# Altium PCB Trottinette_Connexion_2L.PcbDoc
Units mil, origin at the board's own origin, x right, y up, seen from the top; angles counter-clockwise.
Board outline 2559.06 x 4133.86 mil, 2 copper layers (Top, Bottom), stack 60.63 mil thick; 20 components, 19 nets, 72 pads, 12 vias.
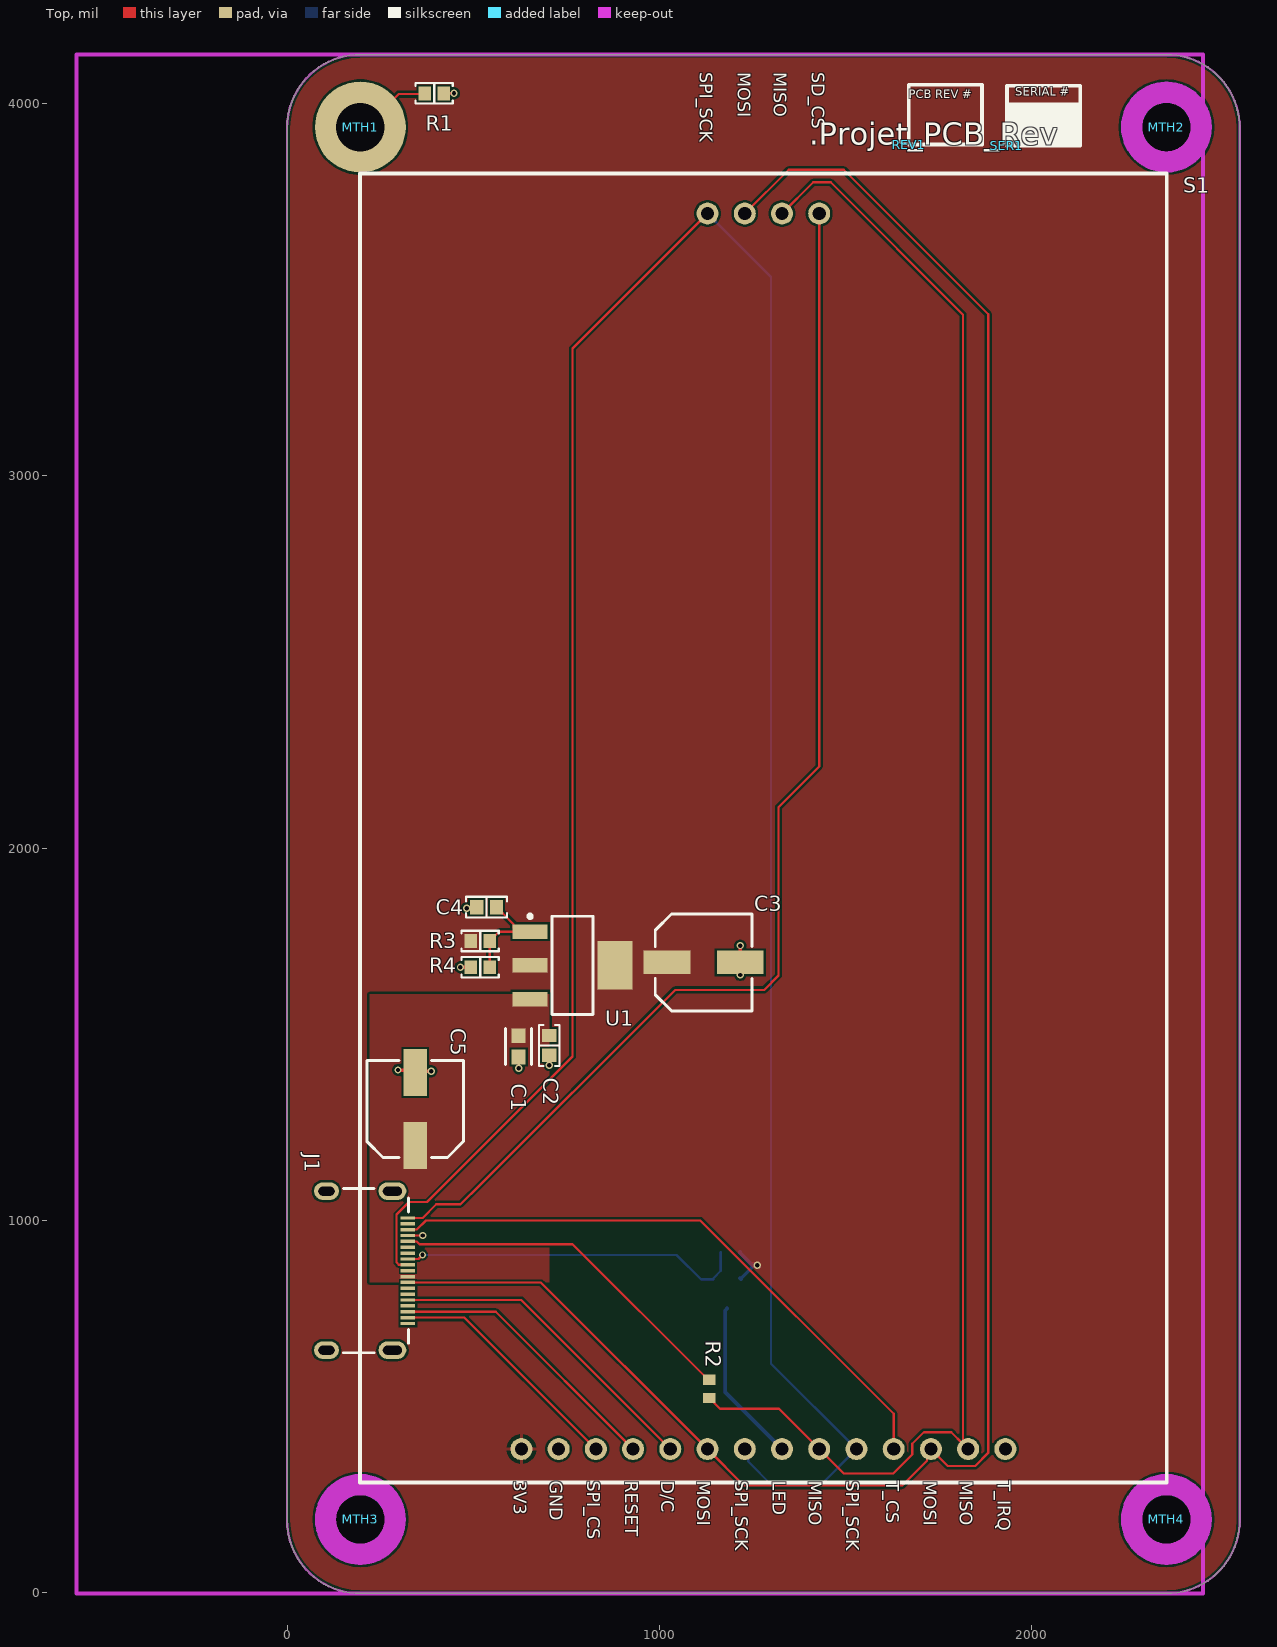
[diagram p0: Top view]
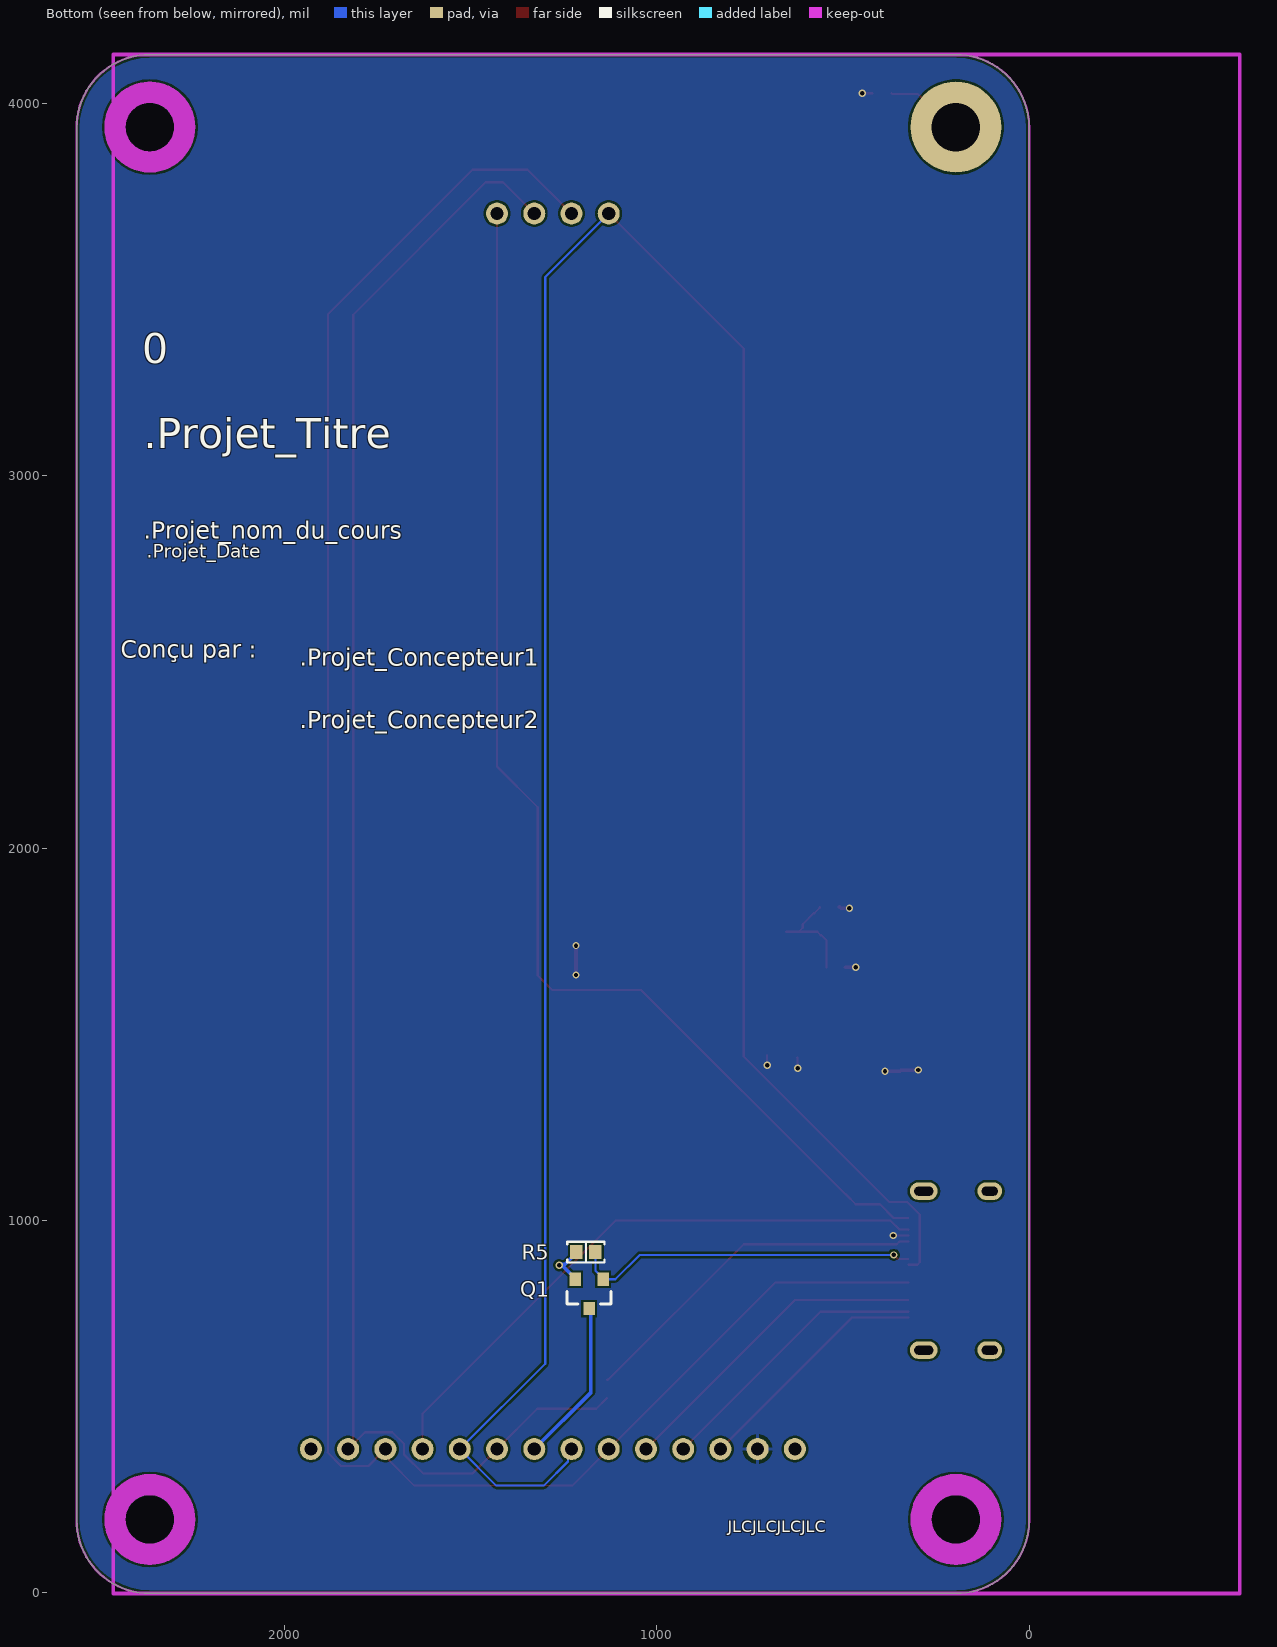
[diagram p1: Bottom view, seen from below]
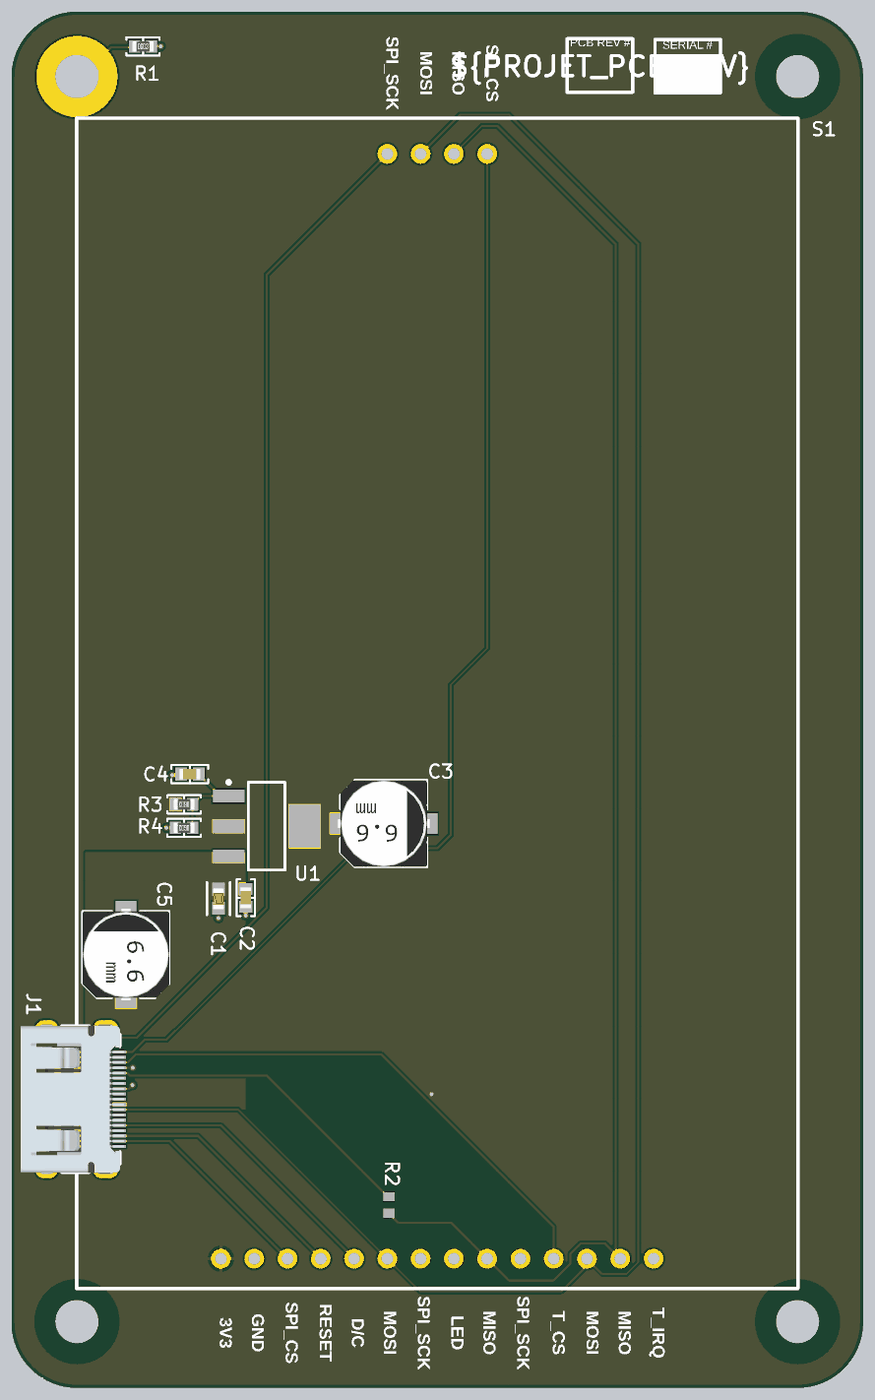
[diagram p2: 3D render of the assembled board from above, using the file's embedded part models]

## Layer stack, top to bottom
Top Solder: solder mask 0.4, Solder Resist, Dk 3.5
Top: signal copper 1.378
Dielectric 1: core 57.874, FR-4, Dk 4.6
Bottom: signal copper 1.378
Bottom Solder: solder mask 0.4, Solder Resist, Dk 3.5

## Board outline
0,194.84 0,3935 cw(c196.85,3935) 196.85,4131.85 2362.2,4131.85 cw(c2362.2,3935) 2559.06,3935 2559.06,194.84 cw(c2362.2,194.84) 2362.2,-2.01 196.85,-2.01 cw(c196.85,194.84)

## Design rules (kind name [scope] priority, off if disabled: settings)
BoardOutlineClearance [All] p1: gap=7.87 ignorepadtopadclearanceinfootprint=FALSE except(0: Arc-SplitContinuation Track-SplitContinuation SMDPad-SplitContinuation THPad-SplitContinuation Via-SplitContinuation Fill-SplitContinuation Poly-SplitContinuation Region-SplitContinuation Text-SplitContinuation)
Clearance [All] p1: gap=6 ignorepadtopadclearanceinfootprint=FALSE except(0: Arc-Hole Track-Hole SMDPad-Hole THPad-Hole Via-Hole Fill-Hole Poly-Hole Region-Hole Text-Hole; 5: Arc-Arc Arc-Track Track-Track SMDPad-Fill SMDPad-Poly SMDPad-Region; 5.98: Via-Fill Via-Poly Via-Region; 7.87: Arc-SMDPad Track-SMDPad; 10: Arc-Via Track-Via Via-Via; 12.99: Arc-THPad Track-THPad; 19.68: THPad-THPad)
ComponentClearance "Schematic Component Clearance Constraint_1" [InComponent('SER1')] p1: gap=0 collisioncheckmode=3 verticalgap=0 showdistances=FALSE
ComponentClearance "Schematic Component Clearance Constraint" [InComponent('REV1')] p2: gap=0 collisioncheckmode=3 verticalgap=0 showdistances=FALSE
ComponentClearance [All] p3: gap=4 collisioncheckmode=3 verticalgap=4 showdistances=FALSE
HoleSize [All] p1: absolutevalues=TRUE maxlimit=248.03 minlimit=11.81 maxpercent=80.000 minpercent=20.000
HoleToHoleClearance [All] p1: gap=19.68 allowstackedmicrovias=FALSE
MinimumAnnularRing [All] p1: minimumring=5.12
MinimumSolderMaskSliver [All] p1: minsoldermaskwidth=3.94
PlaneClearance [All] p1: clearance=6
PlaneConnect [All] p1: pad.planeconnectstyle=Relief pad.reliefexpansion=20 pad.reliefentries=4 pad.reliefconductorwidth=10 pad.reliefairgap=10 via.planeconnectstyle=Direct via.reliefexpansion=20 via.reliefentries=4 via.reliefconductorwidth=10 via.reliefairgap=10
PolygonConnect [All] p1: thpad.connectstyle=Relief thpad.reliefconductorwidth=10 thpad.reliefentries=4 thpad.polygonreliefangle="90 Angle" thpad.airgapwidth=10 smdpad.connectstyle=Direct smdpad.reliefconductorwidth=10 smdpad.reliefentries=4 smdpad.polygonreliefangle="90 Angle" smdpad.airgapwidth=10 via.connectstyle=Direct via.reliefconductorwidth=10 via.reliefentries=4 via.polygonreliefangle="90 Angle" via.airgapwidth=10
RoutingVias [All] p1: holewidth=11.81 width=19.68 viastyle="Through Hole" minholewidth=11.81 minwidth=19.68 maxholewidth=248.03 maxwidth=255.91
SilkToSilkClearance [All] p1: silktosilkclearance=4
SilkToSolderMaskClearance [IsPad] p1: minsilkscreentomaskgap=0.94 clearancetoexposedcopper=FALSE
SolderMaskExpansion SolderMaskExpansion_Via [isVia] p1: expansion=4 istentingtop=TRUE
SolderMaskExpansion [All] p2: expansion=2 istentingtop=FALSE
Width [All] p1: maxlimit=1000 minlimit=5 preferedwidth=6 minimp=50.000000 maximp=50.000000 favimp=50.000000
22 further rules are at their usual default settings.

## Classes and differential pairs
component class Trottinette_Connexion_PCB: " " C2 C3 C4 C5 J1 MTH1 MTH2 MTH3 MTH4 Q1 R1 R2 R3 R4 R5 S1 U1
component class Trottinette_Connexion_Title: REV1 SER1

## Components (designator, comment, footprint, x,y, rotation, side; value= is the part's Value field where it differs from the comment)
C1 "0603ZC104MAT2A" FP-0603-L_1_6_0_15-W_0_81-IPC_B 622.1,1467.33 r270 top
C2 "10 µF" "CAP 0603_1608" 704.09,1470.09 r90 top
C3 "100 µF" "CAP ALSMD 6.6MM H6.1MM" 1118.97,1693.09 r0 top
C4 "10 µF" "CAP 0603_1608" 536.08,1841.7 r0 top
C5 "100 µF" "CAP ALSMD 6.6MM H6.1MM" 344.17,1299.25 r90 top
J1 "685119136923" 685119136923 176.85,865 r270 top
MTH1 "MTH_M3" MTH_M3 157.48,3925 r0 top
MTH2 "MTH_M3_NON_PLATED" MTH_M3_NON_PLATED 2362.2,3937.01 r0 top
MTH3 "MTH_M3_NON_PLATED" MTH_M3_NON_PLATED 196.85,196.85 r0 top
MTH4 "MTH_M3_NON_PLATED" MTH_M3_NON_PLATED 2362.2,196.85 r0 top
Q1 "DMP6350S-7" FP-SOT23-MFG 1181.96,802.61 r270 bottom
R1 "0 Ohms" "RES 0603_1608" 395.36,4027.57 r0 top
R2 "ERJ3EKF30R0V" RESC1608X55X30LL15T15 1134.19,547.36 r270 top value=30ohm
R3 "180 Ohms" "RES 0603_1608" 518.86,1750.68 r180 top
R4 "300 Ohms" "RES 0603_1608" 518.86,1680.22 r180 top
R5 "10 kOhms" "RES 0603_1608" 1190.83,915 r0 bottom
REV1 "Revision Cartridge Mini" REV_REVISION_CARTRIDGE_MINI 1670,3890 r0 top
S1 "ILI9341" PCBComponent_1 1279.51,2064.93 r90 top
SER1 "Serial Cartridge MICRO" SER_SERIAL_CARTRIDGE_MICRO 1933.78,3887.48 r0 top
U1 "LM1117MPX-ADJ" MP04A_N 766.97,1685.17 r0 top

## Footprints (in the part's own frame and the unit in brackets; to place one, negate y for a bottom-side part, rotate by r counter-clockwise, add the part's x,y. Pads: shape width x height; smd on the part's side, far side on the other; paste and mask are expansions set on the pad)
685119136923 [mm] "Mini HDMI SMT Horizontal"
  rect 0.23x1 smd: 1(3.6,3.75) 2(3.2,3.75) 3(2.8,3.75) 4(2.4,3.75) 5(2,3.75) 6(1.6,3.75) 7(1.2,3.75) 8(0.8,3.75) 9(0.4,3.75) 10(0,3.75) 11(-0.4,3.75) 12(-0.8,3.75) 13(-1.2,3.75) 14(-1.6,3.75) 15(-2,3.75) 16(-2.4,3.75) 17(-2.8,3.75) 18(-3.2,3.75) 19(-3.6,3.75)
  oval 1.2x1.9 hole 0.6 slot 1.3 at 90 deg: Shell(-5.425,2.7) Shell(5.425,2.7)
  oval 1.2x1.7 hole 0.6 slot 1.1 at 90 deg: Shell(-5.425,-1.8) Shell(5.425,-1.8)
  silkscreen extent -5.6,-0.65 5.6,3.8, body extent -5.62,-3.8 5.63,4.1, height 3.3
"CAP 0603_1608" [mm] "Chip Capacitor, 2-Leads, Body 1.60x0.80mm, IPC Medium Density"
  rect 0.9x1 smd: 1(-0.675,0) 2(0.675,0)
  silkscreen extent -1.4,-0.7 1.4,0.7, body extent -0.8,-0.41 0.8,0.41, height 0.82
"CAP ALSMD 6.6MM H6.1MM" [mm] "Aluminum Electrolytic Capacitor, Body 6.60x6.60x6.10mm, IPC Low Density"
  rect 3.2x1.6 smd: 1(-2.5,0) 2(2.5,0)
  silkscreen extent -3.3,-3.3 3.3,3.3, body extent -3.5,-3.3 3.5,3.3, height 6.1
FP-0603-L_1_6_0_15-W_0_81-IPC_B [mil]
  rect 39.63x38.12 smd paste+0 mask+0: 1(-28.58,0) 2(28.58,0)
  silkscreen extent -48,-35 48,35, body extent -58,-29 58,29, height 10
FP-SOT23-MFG [mm]
  rect 0.9x0.8 smd paste+0 mask+0: 1(-1,0.95) 2(-1,-0.95) 3(1,0)
  silkscreen extent -0.18,-1.5 0.7,1.5, body extent -1.2,-1.45 1.2,1.45, height 1.1
MP04A_N [mm] "SOT223, 4-Leads, Body 6.5x3.5mm, Pitch 2.3mm, Lead Span 7mm, IPC Medium Density"
  rect 2.4x1 smd: 1(-2.9,2.3) 2(-2.9,0) 3(-2.9,-2.3)
  rect 2.4x3.3 smd: 4(2.9,0)
  silkscreen extent -3.02,-3.35 1.4,3.47, body extent -1.86,-3.35 1.86,3.35, height 1.8
MTH_M3 [mm] "Mounting Hole Metric M3"
  round 6.2 hole 3.3 paste-7.62 mask+0.07: 1(1,0.305)
MTH_M3_NON_PLATED [mm] "Mounting Hole Metric M3 NON_PLATED"
  round 0 hole 3.3 unplated paste-7.62 mask+0.07: 1(0,0)
  Top keep-out circle w1.45: c0,0 r2.375
  Bottom keep-out circle w1.45: c0,0 r2.375
PCBComponent_1 [mm]
  round 1.5 hole 0.9: 1(-42.65,16.51) 2(-42.65,13.97) 3(-42.65,11.43) 4(-42.65,8.89) 5(-42.65,6.35) 6(-42.65,3.81) 7(-42.65,1.27) 8(-42.65,-1.27) 9(-42.65,-3.81) 10(-42.65,-6.35) 11(-42.65,-8.89) 12(-42.65,-11.43) 13(-42.65,-13.97) 14(-42.65,-16.51) 15(41.65,-3.81) 16(41.65,-1.27) 17(41.65,1.27) 18(41.65,3.81)
  Keep-Out Layer lines w0.254: -52.5,46.863 52.5,46.863 52.5,-30 -52.5,-30 -52.5,46.863
  silkscreen extent -44.92,-27.52 44.38,27.52, body extent -44.65,-27.53 44.65,45.87, height 15.1
"RES 0603_1608" [mm] "Chip Resistor, 2-Leads, Body 1.60x0.80mm, IPC Medium Density"
  rect 0.85x0.95 smd: 1(-0.65,0) 2(0.65,0)
  silkscreen extent -1.27,-0.7 1.27,0.7, body extent -0.8,-0.4 0.8,0.4, height 0.45
RESC1608X55X30LL15T15 [mm] "Chip Resistor, 2-Leads, Body 1.60x0.80mm, IPC High Density"
  rect 0.7x0.85 smd: 1(-0.625,0) 2(0.625,0)
  body extent -0.87,-0.48 0.87,0.48, height 0.55
REV_REVISION_CARTRIDGE_MINI [mil]
  silkscreen extent 0,0 197,160
SER_SERIAL_CARTRIDGE_MICRO [mil]
  silkscreen extent 0,0 198,160

## Part data
C1: library part CMP-2006-04550-2, "General Purpose Ceramic Capacitor, 0603, 100nF, 20%, X7R, 15%, 10V", Capacitance="0.1 µF", Case Code (Imperial)=0603, Case Code (Metric)=1608, Dielectric=X7R, Max Operating Temperature=125°C, Min Operating Temperature=-55°C, Package Quantity=4000, Tolerance=20%, Voltage Rating=10V, Case/Package=0603, Construction=Flat, Depth=0.81mm, Lead Free="Lead Free", Lead Pitch=0.014inch, Length=1.6mm, Mount="Surface Mount", Number of Pins=2, packaging="Tape and Reel", Radiation Hardening=No, RoHS Compliant=Yes, series=-, Termination=SMD/SMT, Thickness=0.035inch, Voltage Rating (DC)=10V, Width=0.032inch
C2 C4: library part GRT188R61A106KE13D, "CAP CER 10UF 10V X5R 0603", Device Package=0603, manufacturer="Murata Electronics", Operating Temperature="-55°C ~ 85°C", Package / Case="0603 (1608 Metric)", Ratings=AEC-Q200, Supplier Part Number 1=490-12311-1-ND, Temperature Coefficient=X5R, Tolerance=±10%, Voltage - Rated=10V, Applications=Automotive, Capacitance="10 µF", componentlink1description=Datasheet, componentlink1url=https://search.murata.co.jp/Ceramy/image/img/A01X/G101/ENG/GRT188R61A106KE13-01.pdf, componentlink2description="DigiKey Link", componentlink2url=https://www.digikey.com/en/products/detail/murata-electronics/GRT188R61A106KE13D/5416733, Features="Derating Recommended", lastupdated="2/9/2024 8:10:30 PM", Lifecycle Status=Active, Minimum Order=1, Mounting Type="Surface Mount, MLCC", packaging=TapeAndReel, Part Number=GRT188R61A106KE13D, Part Status=Active, partid=2522, price=0.06, series=GRT, Size / Dimension="0.063\" L x 0.031\" W (1.60mm x 0.80mm)", Supplier 1=DigiKey, Thickness (Max)="0.037\" (0.95mm)"
C3 C5: library part 10SGV100M6.3X6.1, "CAP ALUM 100UF 20% 10V SMD", Device Package="Radial, Can - SMD", Lifetime @ Temp.="2000 Hrs @ 105°C", manufacturer=Rubycon, Operating Temperature="-55°C ~ 105°C", Ratings=AEC-Q200, Ripple Current @ High Frequency="85.2 mA @ 10 kHz", Ripple Current @ Low Frequency="71 mA @ 120 Hz", Supplier Part Number 1=1189-2392-1-ND, Tolerance=±20%, Voltage - Rated="10 V", Applications=Automotive, Capacitance="100 µF", componentlink1description=Datasheet, componentlink1url=http://www.rubycon.co.jp/en/catalog/e_pdfs/aluminum/e_sgv.pdf, componentlink2description="DigiKey Link", componentlink2url=https://www.digikey.com/en/products/detail/rubycon/10SGV100M6-3X6-1/3568604, Height - Seated (Max)="0.240\" (6.10mm)", lastupdated="6/3/2024 8:16:10 PM", Lifecycle Status=Active, Minimum Order=1, Mounting Type="Surface Mount", Package / Case="Radial, Can - SMD", packaging=TapeAndReel, Part Number=10SGV100M6.3X6.1, Part Status=Active, partid=8082, Polarization=Polar, price=0.08, series=SGV, Size / Dimension="0.248\" Dia (6.30mm)", Supplier 1=DigiKey, Surface Mount Land Size="0.260\" L x 0.260\" W (6.60mm x 6.60mm)"
J1: library part CMP-1502-00171-2, Contact Resistance=30mΩ, Current Rating=500mA, Insulation Resistance=100MΩ, Max Operating Temperature=85°C, Min Operating Temperature=-25°C, Operating Supply Voltage=40V, Body Material=Brass, Connector Type=HDMI, Contact Material=Gold, Contact Plating=Gold, Features=Shielded, Gender=Receptacle, Height=3.45mm, Lead Free="Lead Free", Mount="Horizontal, Surface Mount", NexarPartId=19499823, Number of Contacts=19, Number of Pins=19, Number of Positions=19, Orientation=Horizontal, packaging="Tape and Reel", REACH SVHC=Unknown, RoHS=Compliant, Termination=SMD/SMT, Voltage Rating=40V
MTH1: library part CMP-006-000008-2, "MTH - MOUNTING HOLE M3 PLATED - M3", Package=M3, Assembly Type=NONE, Component Type="Standard (No BOM)", Design Item ID=MTH_M3, HelpURL=https://littlemachineshop.com/images/gallery/PDF/TapDrillSizes.pdf, Pin Count=1, Source=CEGEP_SHERBROOKE_TGE_LIBRARY.SchLib
MTH2 MTH3 MTH4: library part CMP-006-000010-2, "MTH - MOUNTING HOLE M3 NON-PLATED - M3", Package=M3, Assembly Type=NONE, Component Type="Standard (No BOM)", Design Item ID=MTH_M3_NON_PLATED, HelpURL=https://littlemachineshop.com/images/gallery/PDF/TapDrillSizes.pdf, Pin Count=0, Source=CEGEP_SHERBROOKE_TGE_LIBRARY.SchLib
Q1: library part CMP-12801-000018-2, "MOSFET P-CHA 60V 720MW SOT23", Case/Package=TO-236-3, Continuous Drain Current (ID)=1.5A, Drain to Source Voltage (Vdss)=60V, Input Capacitance=206pF, Max Operating Temperature=150°C, Max Power Dissipation=720mW, Min Operating Temperature=-55°C, Mount="Surface Mount", packaging="Tape and Reel", Rds On Max=350mR, RoHS Compliant=Yes
R1: library part CR0603AJ/-000EAS, "RESA-AS 0603 0R JUMPER 100MW", Device Package="0603 (1608 Metric)", manufacturer="Bourns Inc.", Operating Temperature="-55°C ~ 155°C", Power (Watts)="0.1W, 1/10W", Ratings=AEC-Q200, Supplier Device Package=0603, Supplier Part Number 1=CR0603AJ/-000EASCT-ND, Tolerance=Jumper, componentlink1description=Datasheet, componentlink1url=//media.digikey.com/pdf/Data%20Sheets/Bourns%20PDFs/CRyyyyA-AS_Model_DS.pdf, componentlink2description="DigiKey Link", componentlink2url=https://www.digikey.com/en/products/detail/bourns-inc/CR0603AJ-000EAS/10240122, Composition="Thick Film", Features="Anti-Sulfur, Automotive AEC-Q200, Moisture Resistant", Height - Seated (Max)="0.022\" (0.55mm)", lastupdated="9/18/2023 7:33:24 PM", Lifecycle Status=Active, Minimum Order=1, Number of Terminations=2, Package / Case="0603 (1608 Metric)", packaging=TapeAndReel, Part Number=CR0603AJ/-000EAS, Part Status=Active, partid=24557, price=0.01, Resistance="0 Ohms", series=CR0603A-AS, Size / Dimension="0.063\" L x 0.031\" W (1.60mm x 0.80mm)", Supplier 1=DigiKey
R2: library part CMP-2000-00423-1, "30Ohms", manufacturer=Panasonic, Tolerance=1%, Part Number=ERJ3EKF30R0V
R3: library part RNCP0603FTD180R, "RES 180 OHM 1% 1/8W 0603", Device Package=0603, manufacturer="Stackpole Electronics Inc", Operating Temperature="-55°C ~ 155°C", Package / Case="0603 (1608 Metric)", Power (Watts)="0.125W, 1/8W", Supplier Part Number 1=RNCP0603FTD180RCT-ND, Temperature Coefficient=±100ppm/°C, Tolerance=±1%, componentlink1description=Datasheet, componentlink1url=https://www.seielect.com/catalog/sei-rncp.pdf, componentlink2description="DigiKey Link", componentlink2url=https://www.digikey.com/en/products/detail/stackpole-electronics-inc/RNCP0603FTD180R/2240089, Composition="Thin Film", Features=Anti-Sulfur, Height - Seated (Max)="0.022\" (0.55mm)", lastupdated="2/9/2024 8:43:33 PM", Lifecycle Status=Active, Minimum Order=1, Number of Terminations=2, packaging=TapeAndReel, Part Number=RNCP0603FTD180R, Part Status=Active, partid=5708, price=0.01, Resistance="180 Ohms", series=RNCP, Size / Dimension="0.061\" L x 0.031\" W (1.55mm x 0.80mm)", Supplier 1=DigiKey, Supplier Device Package=0603
R4: library part CRCW0603300RFKEA, "RES SMD 300 OHM 1% 1/10W 0603", Device Package="0603 (1608 Metric)", manufacturer="Vishay Dale", Operating Temperature="-55°C ~ 155°C", Power (Watts)="0.1W, 1/10W", Ratings=AEC-Q200, Supplier Device Package=0603, Supplier Part Number 1=541-300HCT-ND, Temperature Coefficient=±100ppm/°C, Tolerance=±1%, componentlink1description=Datasheet, componentlink1url=http://www.vishay.com/docs/20035/dcrcwe3.pdf, componentlink2description="DigiKey Link", componentlink2url=https://www.digikey.com/en/products/detail/vishay-dale/CRCW0603300RFKEA/1174606, Composition="Thick Film", Features="Automotive AEC-Q200", Height - Seated (Max)="0.020\" (0.50mm)", lastupdated="2/9/2024 8:43:25 PM", Lifecycle Status=Active, Minimum Order=1, Number of Terminations=2, Package / Case="0603 (1608 Metric)", packaging=TapeAndReel, Part Number=CRCW0603300RFKEA, Part Status=Active, partid=7780, price=0.01, Resistance="300 Ohms", series=CRCW, Size / Dimension="0.061\" L x 0.033\" W (1.55mm x 0.85mm)", Supplier 1=DigiKey
R5: library part RNCS0603BKE10K0, "RES 10K OHM 0.1% 1/16W 0603", Device Package="0603 (1608 Metric)", manufacturer="Stackpole Electronics Inc", Operating Temperature="-55°C ~ 155°C", Power (Watts)="0.063W, 1/16W", Ratings=AEC-Q200, Supplier Device Package=0603, Supplier Part Number 1=RNCS0603BKE10K0CT-ND, Temperature Coefficient=±25ppm/°C, Tolerance=±0.1%, componentlink1description=Datasheet, componentlink1url=https://www.seielect.com/catalog/sei-rncs_rnch.pdf, componentlink2description="DigiKey Link", componentlink2url=https://www.digikey.com/en/products/detail/stackpole-electronics-inc/RNCS0603BKE10K0/1708836, Composition="Thin Film", Features="Anti-Corrosive, Automotive AEC-Q200, Moisture Resistant", Height - Seated (Max)="0.022\" (0.55mm)", lastupdated="2024-02-09 20:43:37", Lifecycle Status=Active, Minimum Order=1, Number of Terminations=2, Package / Case="0603 (1608 Metric)", packaging=TapeAndReel, Part Number=RNCS0603BKE10K0, Part Status=Active, partid=4838, price=0.06, Resistance="10 kOhms", series=RNCS, Size / Dimension="0.061\" L x 0.031\" W (1.55mm x 0.80mm)", Supplier 1=DigiKey
REV1: library part REV_REVISION_CARTRIDGE_MINI, "REV - REVISION CARTRIDGE MINI", Assembly Type=NONE, Rule="Component Clearance Constraint [Horizontal Clearance = 0mil    Vertical Clearance = 0mil]"
S1: "3.2\" 240x320 TFT LCD ILI9341", Cryo=UNKNOWN, GRAMS Lib Spec=3.2, Magnetic Material=UNKNOWN, Solder Paste Type=UNKNOWN, Stencil Thickness (Recommended)=UNKNOWN
SER1: library part SER_SERIAL_CARTRIDGE_MICRO, "SER - SERIAL CARTRIDGE MICRO", Assembly Type=NONE, Rule="Component Clearance Constraint [Horizontal Clearance = 0mil    Vertical Clearance = 0mil]"
U1: library part CMP-0062-01642-3, "800mA Low-Dropout Linear Regulator, 4-pin SOT-223", manufacturer="National Semiconductor", PackageTopMarking=XYTT*N03A, PowerWise=N, Code_IPC=SOT223-4, Code_JEDEC=TO-261-AA, componentlink1description="Manufacturer URL", componentlink1url=http://www.national.com/, componentlink2description="LM1117 Datasheet", componentlink2url=http://www.national.com/ds/LM/LM1117.pdf, ComponentLink3Description="LM1117 Web Page", ComponentLink3URL=http://www.national.com/pf/LM/LM1117.html, ComponentLink4Description="MP04A Package Page", ComponentLink4URL=http://www.national.com/packaging/folders/mp04a.html, CompType="LDO IC", DatasheetVersion=Apr-2006, High-Reliability=Y, PackageDescription="Molded SOT-223, 6.50 x 3.56 x 1.6mm Body, 4 Lead, 2.3mm Pitch", PackageReference=MP04A, PackageVersion="revB, Apr-2003", PartNumber=LM1117MPX-ADJ, PinCount=4, RevisionNote="SCH symbol layout adjusted", RoHS=N

## Via types
v1: diameter 19.68, hole 11.81, Top to Bottom, tented both sides, 12 vias

## Nets (pads, with @x,y where several pads share a name; then routed paths per layer and width w, separated by ;. In a path a pad name is that pad's centre, name@x,y a point inside that pad or via, vN(x,y) a via of type N, cw(c..) or ccw(c..) an arc to the next point about the centre after c; other vN are vias at no path point)
3V3: C3.1 Q1.2 R3.2 R5.2 S1.1 U1.2 U1.4 | length 126.7
  Bottom w10: R5.2 1216.42,913.03 1247.6,881.85 1260.77,881.85 v1(1262.62,880) 1260.77,878.15 1253.56,878.15 1220.33,844.92 1216.42,844.92 Q1.2
5V0: C1.1 C2.2 C5.1 J1.9 U1.3
DC_PIN: J1.5 S1.5 | length 870.9
  Top w6: J1.5 629.06,786.26 S1.5
GND: C1.2 C2.1 C3.2 C4.1 C5.2 J1.16 R1.2 R4.2 S1.2 | length 348
  Top w6: v1(298.1,1404.2) v1@299.09,1403.21 ; J1.16 v1(364.89,959.49) ; R1.2@420.95,4027.57 v1(448.51,4027.57) ; v1(622.1,1409.1) 622.1,1435.72 C1.2@623.23,1436.84 ; v1(704.09,1416.94) C2.1
  Top w10: v1@299.09,1403.21 344.17,1403.21 346.33,1401.05 v1(387.48,1401.05) ; v1(465.71,1680.22) R4.2 ; v1(482.93,1838.71) 506.52,1838.71 C4.1 ; v1(1217.39,1659.19) v1(1217.39,1738.37)
GPIO1: J1.6
GPIO38: J1.18
GPIO39: J1.14
LED_ALIM: Q1.3 S1.8 | length 442.3
  Bottom w10: Q1.3 1177.42,758.7 1177.42,728.77 1177.42,537.9 S1.8
LED_CONTROL: J1.12 Q1.1 R5.1 | length 933.2
  Top w6: J1.12 352.99,896.5 v1(363.86,907.36)
  Bottom w6: v1(363.86,907.36) 1046.42,907.36 1111.8,841.98 Q1.1 1144.56,843.95 1165.24,864.64 R5.1
NetC4_2: C4.2 R3.1 R4.1 U1.1 | length 280.8
  Top w6: R4.1 R3.1 544.45,1752.65 558.18,1766.38 560.15,1766.38 569.49,1775.72 U1.1@618.96,1775.72 ; C4.2 562.66,1839.73 577.37,1825.01 579.34,1825.01 608.55,1795.8 608.55,1786.13 U1.1@618.96,1775.72 ; U1.1 U1.1@618.96,1775.72
NetJ1_15: J1.15 R2.1 | length 963.7
  Top w6: J1.15 324.83,943.39 348.68,943.39 355.83,936.24 766.97,936.24 1131.24,571.97 R2.1
NetMTH1_1: MTH1.1 R1.1 | length 210.4
  Top w6: MTH1.1 242.41,3982.57 256.66,3982.57 299.7,4025.6 367.8,4025.6 R1.1
RST_PIN: J1.3 S1.4 | length 757.9
  Top w6: J1.3 560.56,754.76 S1.4
SD_CS: J1.19 S1.15 | length 3357.4
  Top w6: J1.19 364.27,1006.73 401.07,1043.53 465.95,1043.53 493.27,1070.85 494.08,1070.85 1042.54,1619.31 1281.49,1619.31 1320,1657.82 1320,2110 1429.51,2219.51 S1.15
SPI_CS: J1.2 S1.3 | length 651.3
  Top w6: J1.2 476.3,739.02 S1.3
SPI_MISO: R2.2 S1.9 S1.13 S1.16 | length 4565.7
  Top w6: R2.2 1162.95,494 1321.32,494 S1.9 1495.32,320 1628.08,320 1679.51,371.43 1679.51,400.18 1710.66,431.33 1783.99,431.33 S1.13@1815.8,399.52 ; S1.16 1413.3,3788.48 1460.21,3788.48 1815.8,3432.89 1815.8,413.88 1819.36,410.32 1819.36,403.08 S1.13@1815.8,399.52 ; S1.13 S1.13@1815.8,399.52
SPI_MOSI: J1.8 S1.6 S1.12 S1.17 | length 5794.1
  Top w6: J1.8 681.82,833.5 S1.6 1227.65,287.67 1651.66,287.67 1719.36,355.38 1719.36,375.66 S1.12 1775.03,340.29 1848.37,340.29 1884.46,376.38 cw(c1929.02,385.7) 1883.5,385.7 1883.5,3434.38 1495.32,3822.56 1347.38,3822.56 S1.17
SPI_SCK: J1.11 S1.7 S1.10 S1.18 | length 7104.8
  Top w6: J1.11 324.14,881.09 300.3,881.09 293.93,887.46 293.93,1015.76 327.89,1049.72 376.12,1049.72 766.97,1440.57 766.97,3342.15 S1.18
  Bottom w6: S1.18 1300,3534.21 1300,615.32 S1.10 1431.38,287.67 1303.68,287.67 1238.77,352.58 1238.77,376.55 S1.7
T_CS: J1.17 S1.11 | length 1625.4
  Top w6: J1.17 324.83,975.58 348.68,975.58 373.15,1000.05 1110.26,1000.05 1629.51,480.8 S1.11
pads on no net: J1.1 J1.4 J1.7 J1.10 J1.13 J1.Shell MTH2.1 MTH3.1 MTH4.1 S1.14

## Polygon pours and split planes (outlines as drawn)
5V0 on Top "5V0_L01_P002" (solid, remove dead copper, pour order 2): 221.94,1607.49 704.09,1607.49 704.09,833.5 221.94,833.5
3V3 on Top "3V3_L01_P004" (solid, remove dead copper, pour order 4): 0,4131.55 0,-2.01 2559.06,-2.01 2559.06,4131.55
GND on Bottom "GND_L02_P007" (solid, remove dead copper, pour order 7): 0,4135.03 0,1.48 2559.06,1.48 2559.06,4135.03

## Keep-outs
Keep-Out Layer:
  the board outline again, w5.91

## Silkscreen, mask and mechanical layers (free items; w line width, h text height)
Top Overlay:
  text "SPI_SCK" at 1097.01,4084.59 h59.06 r270
  text "MOSI" at 1198.63,4084.59 h59.06 r270
  text "MISO" at 1295.39,4084.59 h59.06 r270
  text "SD_CS" at 1397.01,4084.59 h59.06 r270
  text "3V3" at 596.56,300.54 h59.06 r270
  text "GND" at 693.12,300.54 h59.06 r270
  text "SPI_CS" at 794.78,300.54 h59.06 r270
  text "RESET" at 896.44,300.54 h59.06 r270
  text "D/C" at 993.22,300.54 h59.06 r270
  text "MOSI" at 1089.99,300.54 h59.06 r270
  text "SPI_SCK" at 1191.65,300.54 h59.06 r270
  text "LED" at 1292.61,300.54 h59.06 r270
  text "MISO" at 1388.7,300.54 h59.06 r270
  text "SPI_SCK" at 1490.36,300.54 h59.06 r270
  text "T_CS" at 1596.88,300.54 h59.06 r270
  text "MOSI" at 1698.55,300.54 h59.06 r270
  text "MISO" at 1795.35,300.54 h59.06 r270
  text "T_IRQ" at 1897.01,300.54 h59.06 r270
Bottom Overlay:
  text "0" at 2382.88,3275.1 h137.8
  text ".Projet_Titre" at 2378.95,3047.88 h137.8
  text ".Projet_nom_du_cours" at 2378.95,2815 h78.74
  text ".Projet_Date" at 2370,2780 h36
  text "Conçu par :" at 2440,2495 h78.74
  text ".Projet_Concepteur1" at 1960,2473.23 h78.74
  text ".Projet_Concepteur2" at 1960,2306.56 h78.74
  text "JLCJLCJLCJLC" at 809.61,163.06 h31.5
Bottom Solder:
  drawing of 2 lines, arcs and shapes, not listed
Board Outline:
  the board outline again, w10

## Text inside footprints (layer, text, board x,y; h text height)
J1: Bottom Assembly "PCB Edge" at 30.96,937.1 h24 r270
REV1: Top Overlay "PCB REV #" at 1670,4006.14 h39.37
SER1: Top Overlay "SERIAL #" at 1955.95,4013.15 h39.37